# Altium PCB 2008_SablierElectronique_PCB.PcbDoc (part 1 of 2)
Units mil, origin at the board's own origin, x right, y up, seen from the top; angles counter-clockwise.
Board outline 5246.25 x 5915.54 mil, 2 copper layers (Top Layer, Bottom Layer), stack 62.441 mil thick; 184 components, 217 nets, 656 pads, 372 vias.
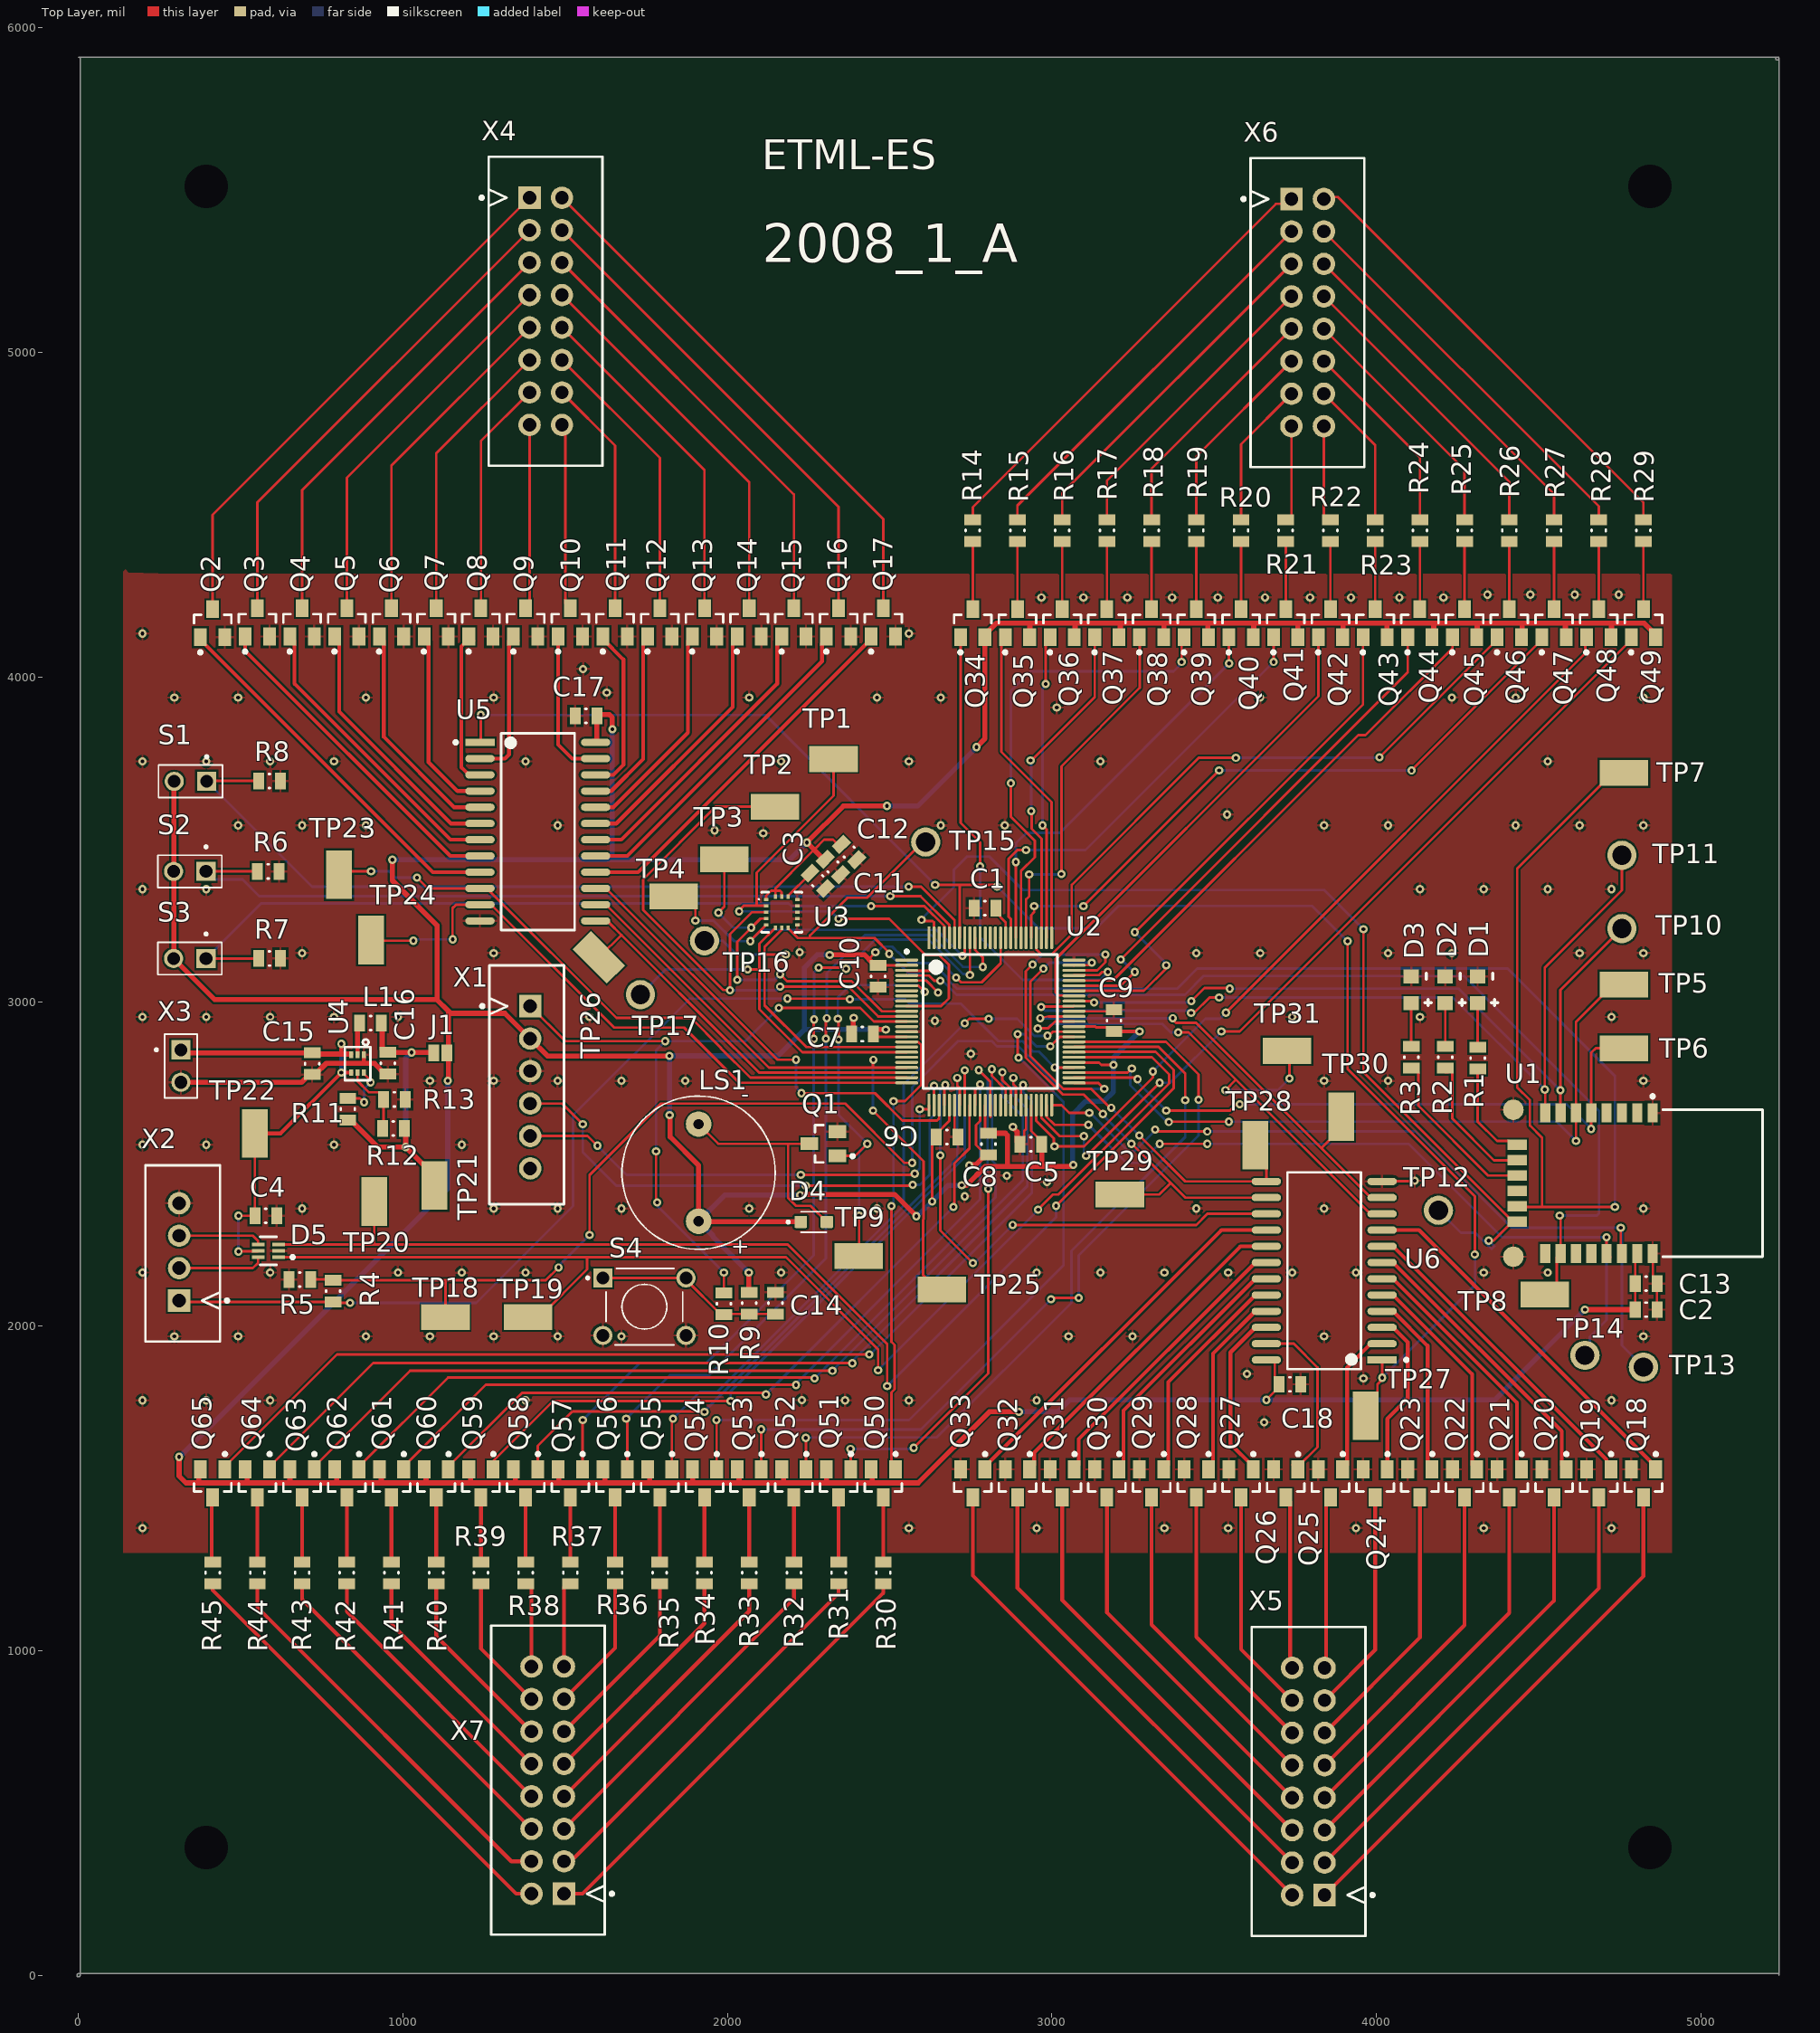
[diagram p0: Top Layer view]
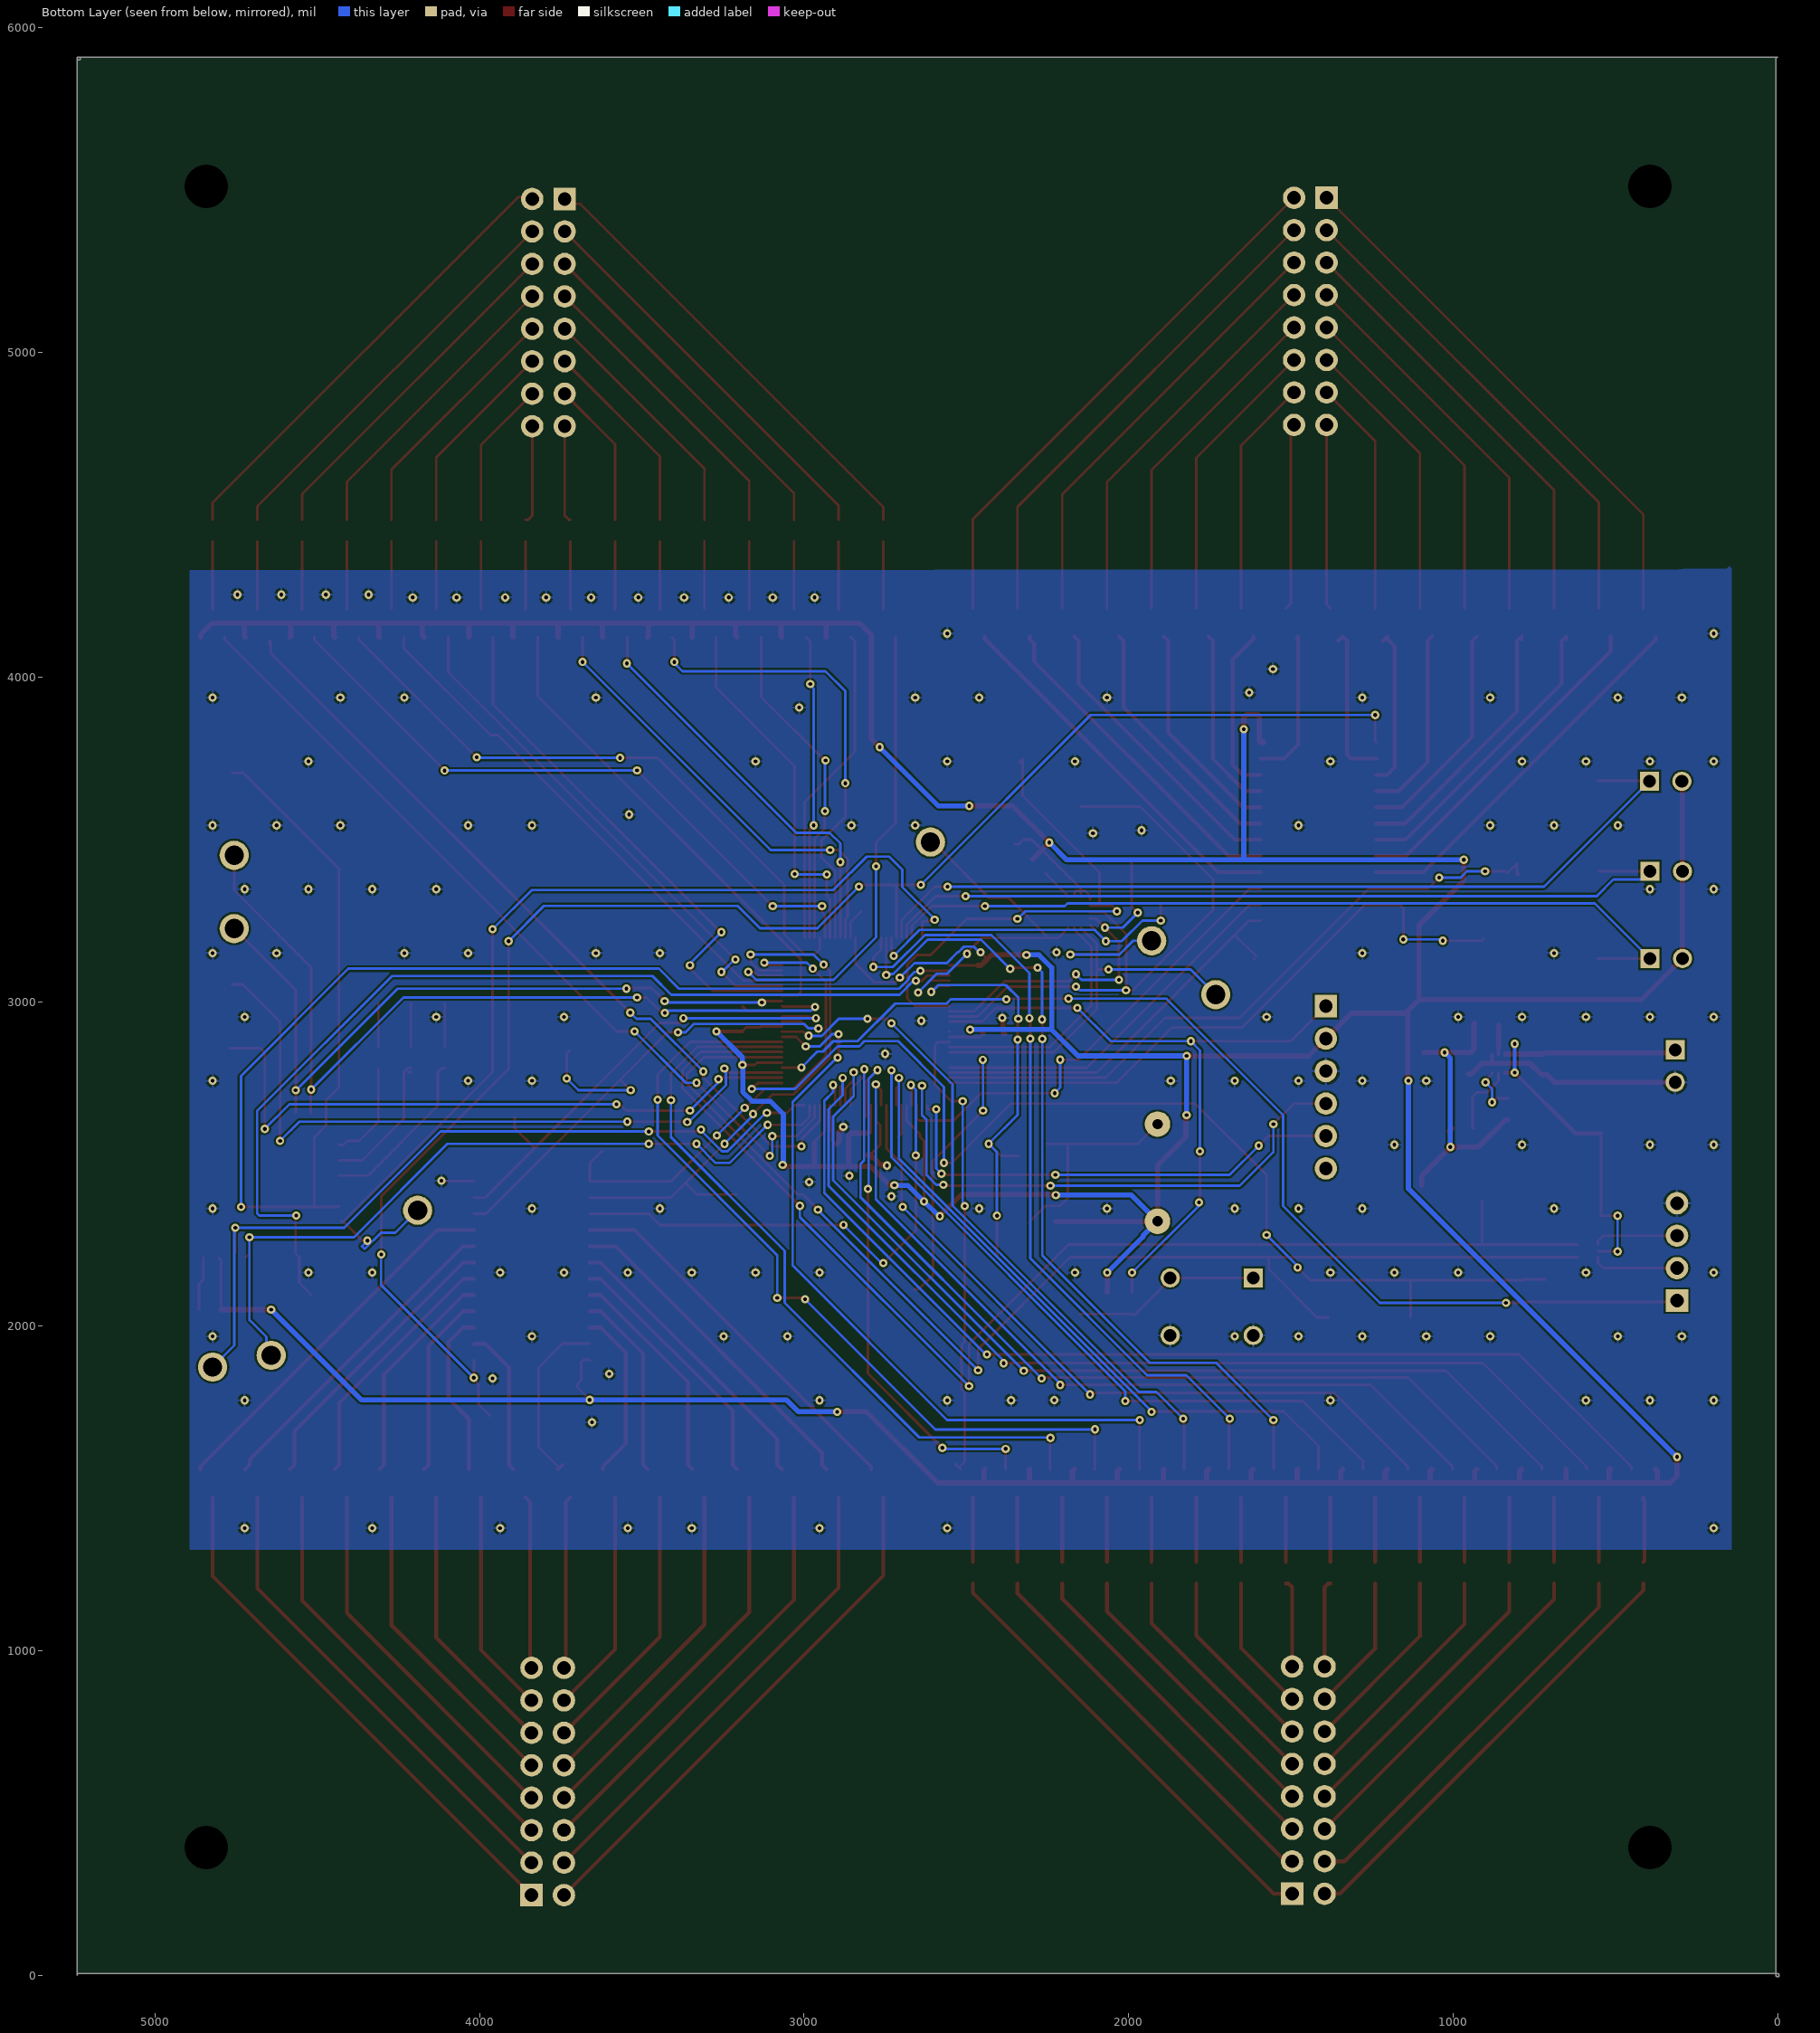
[diagram p1: Bottom Layer view, seen from below]

## Layer stack, top to bottom
Top Solder: solder mask 0.4, Solder Resist, Dk 3.5
Top Layer: signal copper 0.7087
Dielectric1: core 61.0236, FR-4, Dk 4.8
Bottom Layer: signal copper 0.7087
Bottom Solder: solder mask 0.4, Solder Resist, Dk 3.5

## Board outline
0,-5.01 cw(c0,0) -5.01,0 cw(c0,0) 0,5.02 5236.22,5.02 cw(c5236.22,0) 5241.24,0 5241.24,5905.51 ccw(c5236.22,5905.51) 5236.15,5910.53 ccw(c5236.22,5905.51) 5232.81,5909.19 cw(c5234.25,5905.51) 5234.25,5909.46 5236.22,5909.46 cw(c5236.22,5905.51) 5240.17,5905.51 cw(c5236.22,5905.51) 5236.22,5901.56 5234.25,5901.56 cw(c5234.25,5905.51) 5231.21,5902.99 cw(c5234.25,5905.51) 5232.81,5909.19 5236.22,5910.53 0,5910.53 cw(c0,5905.51) 0,5910.53 cw(c0,5905.51) 5.01,5905.51 5.01,5900.5 5.02,5.02 5.02,0 cw(c0,0)

## Design rules (kind name [scope] priority, off if disabled: settings)
BoardOutlineClearance [All] p1: gap=9.84 ignorepadtopadclearanceinfootprint=FALSE except(0: Arc-SplitContinuation Track-SplitContinuation SMDPad-SplitContinuation THPad-SplitContinuation Via-SplitContinuation Fill-SplitContinuation Poly-SplitContinuation Region-SplitContinuation Text-SplitContinuation)
Clearance Clearance-xPP-xTP-xTT [All] p1: gap=5.91 ignorepadtopadclearanceinfootprint=FALSE except(0: Arc-Hole Track-Hole SMDPad-Hole THPad-Hole Via-Hole Fill-Hole Poly-Hole Region-Hole Text-Hole)
ComponentClearance [All] p1: gap=9.84 collisioncheckmode=3 verticalgap=9.84 showdistances=FALSE
DiffPairsRouting [All] p1: maxlimit=9.84 minlimit=9.84 mostfreqgap=9.84 toplayer_minwidth=15 toplayer_maxwidth=15 toplayer_prefwidth=15 bottomlayer_minwidth=15 bottomlayer_maxwidth=15 bottomlayer_prefwidth=15 maxuncoupledlength=492.13
Height [All] p1: minheight=0 maxheight=984.25 prefheight=492.13
HoleSize HoleSize-PTH [All] p1: absolutevalues=TRUE maxlimit=393.7 minlimit=9.84 maxpercent=80.000 minpercent=20.000
HoleToHoleClearance [All] p1: gap=13.78 allowstackedmicrovias=TRUE
MinimumAnnularRing "Minimum IAR  >0.45mm" [((ObjectKind = 'Pad') OR (ObjectKind = 'Via')) And (Layer = 'MultiLayer') And (HoleDiameter > AsMM(0.45))] p1: minimumring=6.89 // minimum inner annular ring for pads > 0.45mm finished hole size
MinimumAnnularRing "Minimum IAR <=0.45mm" [((ObjectKind = 'Pad') OR (ObjectKind = 'Via')) And (Layer = 'MultiLayer') And (HoleDiameter <= AsMM(0.45))] p2: minimumring=6.89 // minimum inner annular ring for pads <= 0.45mm finished hole size
MinimumSolderMaskSliver [All] p1: minsoldermaskwidth=3.15
PasteMaskExpansion [All] p1: expansion=-0.98
PlaneClearance PlaneClearance-IPI [All] p1: clearance=9.84
PlaneConnect [All] p1: planeconnectstyle=Relief reliefexpansion=6.89 reliefentries=4 reliefconductorwidth=7.87 reliefairgap=7.87
PolygonConnect PolygonConnect-xTW [All] p1: connectstyle=Relief reliefconductorwidth=7.87 reliefentries=4 polygonreliefangle="90 Angle" airgapwidth=7.87
RoutingCorners [All] p1: cornerstyle=45-Degree minsetback=98.43 maxsetback=98.43
RoutingVias RoutingViasES [All] p1: holewidth=11.81 width=25.59 viastyle="Through Hole" minholewidth=9.84 minwidth=24.02 maxholewidth=17.72 maxwidth=31.5 // finishet hole size <= 0.45mm
SilkToSilkClearance [All] p1: silktosilkclearance=7.87
SilkToSolderMaskClearance SilkscreenOverComponentPads [IsPad] p1: minsilkscreentomaskgap=7.87 clearancetoexposedcopper=TRUE
SolderMaskExpansion [All] p1: expansion=0
UnRoutedNet [All] p1: checkbadconnections=TRUE
Width Alim [InNetClass('Power')] p1: maxlimit=15.75 minlimit=7.87 preferedwidth=11.81 minimp=50.000000 maximp=50.000000 favimp=50.000000
Width Width-xTW [All] p2: maxlimit=59.06 minlimit=7.87 preferedwidth=11.81 minimp=50.000000 maximp=50.000000 favimp=50.000000
17 further rules are at their usual default settings.

## Classes and differential pairs
net class Power: +5 GND NetC16_2 NetL1_2 VCC
component class 2008_SablierElectronique_MosfetConnections: Q34 Q35 Q36 Q37 Q38 Q39 Q40 Q41 Q42 Q43 Q44 Q45 Q46 Q47 Q48 Q49 Q50 Q51 Q52 Q53 Q54 Q55 Q56 Q57 Q58 Q59 Q60 Q61 Q62 Q63 Q64 Q65 R14 R15 R16 R17 R18 R19 R20 R21 R22 R23 R24 R25 R26 R27 R28 R29 R30 R31 R32 R33 R34 R35 R36 R37 R38 R39 R40 R41 R42 R43 R44 R45 X6 X7
component class 2008_SablierElectronique_Commande_Matrice: C17 C18 Q2 Q3 Q4 Q5 Q6 Q7 Q8 Q9 Q10 Q11 Q12 Q13 Q14 Q15 Q16 Q17 Q18 Q19 Q20 Q21 Q22 Q23 Q24 Q25 Q26 Q27 Q28 Q29 Q30 Q31 Q32 Q33 TP23 TP24 TP25 TP26 TP27 TP28 TP29 TP30 TP31 U5 U6 X4 X5
component class 2008_SablierElectronique_Alim: C15 C16 J1 L1 R11 R12 R13 TP21 TP22 U4 X3
component class 2008_SablierElectronique_SCH: C1 C2 C3 C4 C5 C6 C7 C8 C9 C10 C11 C12 C13 C14 D1 D2 D3 D4 D5 LS1 Q1 R1 R2 R3 R4 R5 R6 R7 R8 R9 R10 S1 S2 S3 S4 TP1 TP2 TP3 TP4 TP5 TP6 TP7 TP8 TP9 TP10 TP11 TP12 TP13 TP14 TP15 TP16 TP17 TP18 TP19 TP20 U1 U3 X1 X2

## Components (designator, comment, footprint, x,y, rotation, side; value= is the part's Value field where it differs from the comment)
C1 "10uF" RESC0805(2012)_L 2793.31,3288.38 r180 top
C2 "4.7uF" RESC0805(2012)_L 4831,2050.82 r180 top
C3 "10nF" RESC0805(2012)_L 2278,3372.08 r135 top
C4 "100nF" RESC0805(2012)_L 577,2340 r180 top
C5 "100nF" RESC0805(2012)_L 2935,2560 r0 top
C6 "100nF" RESC0805(2012)_L 2676.54,2583.06 r180 top
C7 "100nF" RESC0805(2012)_L 2415.46,2900 r0 top
C8 "100nF" RESC0805(2012)_L 2804,2561 r90 top
C9 "100nF" RESC0805(2012)_L 3191,2941.54 r270 top
C10 "100nF" RESC0805(2012)_L 2464,3078 r90 top
C11 "100nF" RESC0805(2012)_L 2325,3415 r135 top
C12 "10uF" RESC0805(2012)_L 2374.81,3460.86 r135 top
C13 "100nF" RESC0805(2012)_L 4831,2130.82 r180 top
C14 "100nf" RESC0805(2012)_L 2148,2071 r270 top
C15 "10uF" RESC0805(2012)_L 720,2808.82 r90 top
C16 "22uF" RESC0805(2012)_L 953.43,2810 r90 top
C17 "100nF" RESC0805(2012)_L 1564,3880 r0 top
C18 "100nF" RESC0805(2012)_L 3733,1821 r180 top
D1 "KPT-2012SRC-PRV" 0805_LED 4312,3036.18 r270 top
D2 "KPT-2012SRC-PRV" 0805_LED 4212,3036.18 r270 top
D3 "KPT-2012SRC-PRV" 0805_LED 4107.18,3036.18 r270 top
D4 "SD0805S040S0R1" DIOSC130X200X100-2N 2266,2321.05 r0 top
D5 "USBLC6-2P6" FP-SOT-666-MFG 585,2232 r180 top
J1 "Jumper" Jumper 1114.99,2842.28 r180 top
L1 "LQM21PN1R0MCHD0" RESC0805(2012)_L 900,2934.23 r180 top value=1uH
LS1 "CMI-1295IC-0385T" CUI_CMI-1295IC-0385T 1911,2473 r180 top
Q1 "Mosfet-N" FAIR-SOT23-3_V 2295.46,2562 r90 top
Q2 "Mosfet-N" FAIR-SOT23-3_V 413.39,4166.14 r0 top
Q3 "Mosfet-N" FAIR-SOT23-3_V 551.18,4168.53 r0 top
Q4 "Mosfet-N" FAIR-SOT23-3_V 688.98,4168.53 r0 top
Q5 "Mosfet-N" FAIR-SOT23-3_V 826.77,4168.53 r0 top
Q6 "Mosfet-N" FAIR-SOT23-3_V 964.57,4168.53 r0 top
Q7 "Mosfet-N" FAIR-SOT23-3_V 1102.36,4168.53 r0 top
Q8 "Mosfet-N" FAIR-SOT23-3_V 1240.16,4168.53 r0 top
Q9 "Mosfet-N" FAIR-SOT23-3_V 1377.95,4168.53 r0 top
Q10 "Mosfet-N" FAIR-SOT23-3_V 1515.75,4168.53 r0 top
Q11 "Mosfet-N" FAIR-SOT23-3_V 1653.54,4168.53 r0 top
Q12 "Mosfet-N" FAIR-SOT23-3_V 1791.34,4168.53 r0 top
Q13 "Mosfet-N" FAIR-SOT23-3_V 1929.13,4168.53 r0 top
Q14 "Mosfet-N" FAIR-SOT23-3_V 2066.93,4168.53 r0 top
Q15 "Mosfet-N" FAIR-SOT23-3_V 2204.72,4168.53 r0 top
Q16 "Mosfet-N" FAIR-SOT23-3_V 2342.52,4168.53 r0 top
Q17 "Mosfet-N" FAIR-SOT23-3_V 2480.31,4168.53 r0 top
Q18 "Mosfet-N" FAIR-SOT23-3_V 4822.83,1515.75 r180 top
Q19 "Mosfet-N" FAIR-SOT23-3_V 4685.04,1515.75 r180 top
Q20 "Mosfet-N" FAIR-SOT23-3_V 4547.24,1515.75 r180 top
Q21 "Mosfet-N" FAIR-SOT23-3_V 4409.45,1515.75 r180 top
Q22 "Mosfet-N" FAIR-SOT23-3_V 4271.65,1515.75 r180 top
Q23 "Mosfet-N" FAIR-SOT23-3_V 4133.86,1515.75 r180 top
Q24 "Mosfet-N" FAIR-SOT23-3_V 3996.06,1515.75 r180 top
Q25 "Mosfet-N" FAIR-SOT23-3_V 3858.27,1515.75 r180 top
Q26 "Mosfet-N" FAIR-SOT23-3_V 3720.47,1515.75 r180 top
Q27 "Mosfet-N" FAIR-SOT23-3_V 3582.68,1515.75 r180 top
Q28 "Mosfet-N" FAIR-SOT23-3_V 3444.88,1515.75 r180 top
Q29 "Mosfet-N" FAIR-SOT23-3_V 3307.09,1515.75 r180 top
Q30 "Mosfet-N" FAIR-SOT23-3_V 3169.29,1515.75 r180 top
Q31 "Mosfet-N" FAIR-SOT23-3_V 3031.5,1515.75 r180 top
Q32 "Mosfet-N" FAIR-SOT23-3_V 2893.7,1515.75 r180 top
Q33 "Mosfet-N" FAIR-SOT23-3_V 2755.91,1515.75 r180 top
Q34 "Mosfet P" FAIR-SOT23-3_V 2755.91,4166.14 r0 top
Q35 "Mosfet P" FAIR-SOT23-3_V 2893.7,4166.14 r0 top
Q36 "Mosfet P" FAIR-SOT23-3_V 3031.5,4166.14 r0 top
Q37 "Mosfet P" FAIR-SOT23-3_V 3169.29,4166.14 r0 top
Q38 "Mosfet P" FAIR-SOT23-3_V 3307.09,4166.14 r0 top
Q39 "Mosfet P" FAIR-SOT23-3_V 3444.88,4166.14 r0 top
Q40 "Mosfet P" FAIR-SOT23-3_V 3582.68,4166.14 r0 top
Q41 "Mosfet P" FAIR-SOT23-3_V 3720.47,4166.14 r0 top
Q42 "Mosfet P" FAIR-SOT23-3_V 3858.27,4166.14 r0 top
Q43 "Mosfet P" FAIR-SOT23-3_V 3996.06,4166.14 r0 top
Q44 "Mosfet P" FAIR-SOT23-3_V 4133.86,4166.14 r0 top
Q45 "Mosfet P" FAIR-SOT23-3_V 4271.65,4166.14 r0 top
Q46 "Mosfet P" FAIR-SOT23-3_V 4409.45,4166.14 r0 top
Q47 "Mosfet P" FAIR-SOT23-3_V 4547.24,4166.14 r0 top
Q48 "Mosfet P" FAIR-SOT23-3_V 4685.04,4166.14 r0 top
Q49 "Mosfet P" FAIR-SOT23-3_V 4822.83,4166.14 r0 top
Q50 "Mosfet P" FAIR-SOT23-3_V 2480.31,1515.75 r180 top
Q51 "Mosfet P" FAIR-SOT23-3_V 2342.52,1515.75 r180 top
Q52 "Mosfet P" FAIR-SOT23-3_V 2204.72,1515.75 r180 top
Q53 "Mosfet P" FAIR-SOT23-3_V 2066.93,1515.75 r180 top
Q54 "Mosfet P" FAIR-SOT23-3_V 1929.13,1515.75 r180 top
Q55 "Mosfet P" FAIR-SOT23-3_V 1791.34,1515.75 r180 top
Q56 "Mosfet P" FAIR-SOT23-3_V 1653.54,1515.75 r180 top
Q57 "Mosfet P" FAIR-SOT23-3_V 1515.75,1515.75 r180 top
Q58 "Mosfet P" FAIR-SOT23-3_V 1377.95,1515.75 r180 top
Q59 "Mosfet P" FAIR-SOT23-3_V 1240.16,1515.75 r180 top
Q60 "Mosfet P" FAIR-SOT23-3_V 1102.36,1515.75 r180 top
Q61 "Mosfet P" FAIR-SOT23-3_V 964.57,1515.75 r180 top
Q62 "Mosfet P" FAIR-SOT23-3_V 826.77,1515.75 r180 top
Q63 "Mosfet P" FAIR-SOT23-3_V 688.98,1515.75 r180 top
Q64 "Mosfet P" FAIR-SOT23-3_V 551.18,1515.75 r180 top
Q65 "Mosfet P" FAIR-SOT23-3_V 413.39,1515.75 r180 top
R1 "680" RESC0805(2012)_L 4312,2826 r90 top
R2 "680" RESC0805(2012)_L 4212,2828.66 r90 top
R3 "680" RESC0805(2012)_L 4107.18,2828.66 r90 top
R4 "51k" RESC0805(2012)_L 785,2108 r270 top
R5 "100k" RESC0805(2012)_L 682,2144 r180 top
R6 "10k" RESC0805(2012)_L 584.64,3401.32 r0 top
R7 "10k" RESC0805(2012)_L 588.58,3132.82 r0 top
R8 "10k" RESC0805(2012)_L 588.58,3680 r0 top
R9 "10k" RESC0805(2012)_L 2066.93,2071 r270 top
R10 "1k" RESC0805(2012)_L 1989,2069 r90 top
R11 "1M" RESC0805(2012)_L 830,2668.82 r90 top
R12 "453k" RESC0805(2012)_L 970,2608.82 r180 top
R13 "100k" RESC0805(2012)_L 973.46,2698.82 r0 top
R14 "680" RESC0805(2012)_L 2755.91,4451.57 r270 top
R15 "680" RESC0805(2012)_L 2893.7,4451.57 r270 top
R16 "680" RESC0805(2012)_L 3031.5,4451.57 r270 top
R17 "680" RESC0805(2012)_L 3169.29,4451.57 r270 top
R18 "680" RESC0805(2012)_L 3307.09,4451.57 r270 top
R19 "680" RESC0805(2012)_L 3444.88,4451.57 r270 top
R20 "680" RESC0805(2012)_L 3582.68,4451.57 r270 top
R21 "680" RESC0805(2012)_L 3720.47,4451.57 r270 top
R22 "680" RESC0805(2012)_L 3858.27,4451.57 r270 top
R23 "680" RESC0805(2012)_L 3996.06,4451.57 r270 top
R24 "680" RESC0805(2012)_L 4133.86,4451.57 r270 top
R25 "680" RESC0805(2012)_L 4271.65,4451.57 r270 top
R26 "680" RESC0805(2012)_L 4409.45,4451.57 r270 top
R27 "680" RESC0805(2012)_L 4547.24,4451.57 r270 top
R28 "680" RESC0805(2012)_L 4685.04,4451.57 r270 top
R29 "680" RESC0805(2012)_L 4822.83,4451.57 r270 top
R30 "680" RESC0805(2012)_L 2480.31,1240.16 r90 top
R31 "680" RESC0805(2012)_L 2342.52,1240.16 r90 top
R32 "680" RESC0805(2012)_L 2204.72,1240.16 r90 top
R33 "680" RESC0805(2012)_L 2066.93,1240.16 r90 top
R34 "680" RESC0805(2012)_L 1929.13,1240.16 r90 top
R35 "680" RESC0805(2012)_L 1791.34,1240.16 r90 top
R36 "680" RESC0805(2012)_L 1653.54,1240.16 r90 top
R37 "680" RESC0805(2012)_L 1515.75,1240.16 r90 top
R38 "680" RESC0805(2012)_L 1377.95,1240.16 r90 top
R39 "680" RESC0805(2012)_L 1240.16,1240.16 r90 top
R40 "680" RESC0805(2012)_L 1102.36,1240.16 r90 top
R41 "680" RESC0805(2012)_L 964.57,1240.16 r90 top
R42 "680" RESC0805(2012)_L 826.77,1240.16 r90 top
R43 "680" RESC0805(2012)_L 688.98,1240.16 r90 top
R44 "680" RESC0805(2012)_L 551.18,1240.16 r90 top
R45 "680" RESC0805(2012)_L 413.39,1240.16 r90 top
S1 "Bouton HAUT" "Header 2 pin" 395,3678.82 r270 top
S2 "Bouton BAS" "Header 2 pin" 393,3401.32 r270 top
S3 "Bouton H/M/S" "Header 2 pin" 393,3132.82 r270 top
S4 "FSM4JH" SW_FSM4JH 1744,2060 r0 top
TP1 "5019" TESTPOINT_SMD#1 2326.78,3747.34 r180 top
TP2 "5019" TESTPOINT_SMD#1 2146.42,3600.48 r0 top
TP3 "5019" TESTPOINT_SMD#1 1990.45,3438.66 r0 top
TP4 "5019" TESTPOINT_SMD#1 1834.63,3323.88 r0 top
TP5 "5019" TESTPOINT_SMD#1 4763.04,3052.87 r0 top
TP6 "5019" TESTPOINT_SMD#1 4763.04,2856.31 r0 top
TP7 "5019" TESTPOINT_SMD#1 4763.04,3704.7 r0 top
TP8 "5019" TESTPOINT_SMD#1 4519,2097.35 r0 top
TP9 "5019" TESTPOINT_SMD#1 2404.73,2216.38 r0 top
TP10 "5019" TESTPOINT_SMD_Via 4756.51,3225.15 r0 top
TP11 "5019" TESTPOINT_SMD_Via 4756.51,3451 r0 top
TP12 "5019" TESTPOINT_SMD_Via 4191,2356.96 r0 top
TP13 "5019" TESTPOINT_SMD_Via 4822.84,1874.01 r0 top
TP14 "5019" TESTPOINT_SMD_Via 4642.56,1910.31 r0 top
TP15 "5019" TESTPOINT_SMD_Via 2610.6,3491.58 r0 top
TP16 "5019" TESTPOINT_SMD_Via 1929,3187.6 r0 top
TP17 "5019" TESTPOINT_SMD_Via 1731.61,3021.7 r0 top
TP18 "5019" TESTPOINT_SMD#1 1131,2027.5 r0 top
TP19 "5019" TESTPOINT_SMD#1 1385.24,2027.5 r180 top
TP20 "5019" TESTPOINT_SMD#1 911.25,2384 r90 top
TP21 "5019" TESTPOINT_SMD#1 1096.78,2433.69 r90 top
TP22 "5019" TESTPOINT_SMD#1 543.54,2593.89 r90 top
TP23 "5019" TESTPOINT_SMD#1 803.15,3391.28 r270 top
TP24 "5019" TESTPOINT_SMD#1 901.27,3189.8 r270 top
TP25 "5019" TESTPOINT_SMD#1 2660.29,2113.4 r0 top
TP26 "5019" TESTPOINT_SMD#2 1603.62,3136.26 r90 top
TP27 "5019" TESTPOINT_SMD#1 3967.12,1724 r90 top
TP28 "5019" TESTPOINT_SMD#1 3626.66,2557.93 r270 top
TP29 "5019" TESTPOINT_SMD#1 3209.35,2405.51 r0 top
TP30 "5019" TESTPOINT_SMD#1 3891.93,2645.08 r90 top
TP31 "5019" TESTPOINT_SMD#1 3724,2848.42 r0 top
U1 "MCHP-RN4020-MODULE-24" MCHP-MODULE-24_V 4636.43,2440.47 r270 top
U2 "MC-32B-MX795-SQ100" TQFP-PT100_N 2810,2938.82 r0 top
U3 "STM-L3GD20H-LGA-16_A" STM-LGA-16 2167.32,3275.66 r0 top
U4 "TLV62585PDRLR" SOT563 860,2808.82 r270 top
U5 "CD74HCT4067" SOIC24 1415.35,3523.82 r0 top
U6 "CD74HCT4067" SOIC24 3839,2171 r180 top
X1 "ICD" CON6 1392,2986 r270 top
X2 "USB" CON4 310,2078.82 r90 top
X3 "Alimentation" "Header 2 pin" 315.59,2851.5 r0 top
X4 "Lignes haut" CON8X8(EDITED) 1390,5477 r270 top
X5 "Lignes bas" CON8X8(EDITED) 3840.16,247.12 r90 top
X6 "Colonnes haut" CON8X8(EDITED) 3738,5473 r270 top
X7 "Colonnes bas" CON8X8(EDITED) 1496.06,251.18 r90 top

## Footprints (in the part's own frame and the unit in brackets; to place one, negate y for a bottom-side part, rotate by r counter-clockwise, add the part's x,y. Pads: shape width x height; smd on the part's side, far side on the other; paste and mask are expansions set on the pad)
0805_LED [mm] "Chip LED, 2-Leads, Body 2.0x1.3mm, IPC Medium Density"
  rect 1.1x1.2 smd: 1(-1.05,0) 2(1.05,0)
  silkscreen extent -1.3,1.09 1.22,1.55, body extent -1,-0.62 1,0.63, height 0.68
CON4 [mm] "2.54mm pitch, 16 pin, header;shrouded"
  rect 1.75x1.75 / inner round 1.75 / far side rect 1.75x1.75 hole 1.05 mask+0: 1(0,0)
  round 1.75 hole 1.05 mask+0: 2(2.54,0) 3(5.08,0) 4(7.62,0)
  silkscreen extent -3.2,-3.88 10.59,2.64
CON6 [mm] "2.54mm pitch, 16 pin, header;shrouded"
  rect 1.75x1.75 / inner round 1.75 / far side rect 1.75x1.75 hole 1.05 mask+0: 1(0,0)
  round 1.75 hole 1.05 mask+0: 2(2.54,0) 3(5.08,0) 4(7.62,0) 5(10.16,0) 6(12.7,0)
  silkscreen extent -3.2,-3.87 15.49,2.64
CON8X8(EDITED) [mm] "2.54mm pitch, 16 pin, header;shrouded"
  rect 1.75x1.75 / inner round 1.75 / far side rect 1.75x1.75 hole 1.05 mask+0: 1(0,0)
  round 1.75 hole 1.05 mask+0: 2(2.54,0) 3(5.08,0) 4(7.62,0) 5(10.16,0) 6(12.7,0) 7(15.24,0) 8(17.78,0) 9(17.78,2.54) 10(15.24,2.54) 11(12.7,2.54) 12(10.16,2.54) 13(7.62,2.54) 14(5.08,2.54) 15(2.54,2.54) 16(0,2.54)
  silkscreen extent -3.2,-3.87 20.98,5.7, body extent -1.37,-1.27 18.95,3.76, height 9.59
CUI_CMI-1295IC-0385T [mm]
  round 2 hole 0.8: N(0,-3.8) P(0,3.8)
  silkscreen extent -6,-6 6,6
DIOSC130X200X100-2N [mm]
  rrect25% 0.99x0.97 smd: A(1.02,0) C(-1.02,0)
  silkscreen extent -2.1,-0.8 1,0.81
FAIR-SOT23-3_V [mm] "SOT23, 3-Leads, Body 2.92x1.3mm, Pitch 0.95mm"
  rect 1x1.4 smd: 1(-0.95,-1.1) 2(0.95,-1.1) 3(0,1.1)
  silkscreen extent -1.46,-2.41 1.46,0.65, body extent -1.46,-0.65 1.46,0.65, height 1.2
FP-SOT-666-MFG [mm]
  rect 0.99x0.3 smd paste+0 mask+0: 1(-0.805,0.5) 2(-0.805,0) 3(-0.805,-0.5) 4(0.805,-0.5) 5(0.805,0) 6(0.805,0.5)
  silkscreen extent -2.02,-1.1 0.65,1.1, body extent -1.4,-0.95 1.4,0.95, height 0.25
"Header 2 pin" [mm]
  rect 1.5x1.5 hole 1: 1(0,0)
  round 1.5 hole 1: 2(0,-2.54)
  silkscreen extent -2.02,-3.77 1.27,1.23
Jumper [mm] "Jumper SMD"
  rect 0.85x1.3 smd paste+0 mask+0.025: 1(-0.508,0)
  rect 0.85x1.3 smd mask+0.025: 2(0.508,0)
MCHP-MODULE-24_V [mm] "Module, 24-Leads, Body 11.5x19.5mm, Pitch 1.2mm"
  rect 1.5x0.8 smd: 1(-5.5,5.45) 2(-5.5,4.25) 3(-5.5,3.05) 4(-5.5,1.85) 5(-5.5,0.65) 6(-5.5,-0.55) 7(-5.5,-1.75) 8(-5.5,-2.95) 17(5.5,-2.95) 18(5.5,-1.75) 19(5.5,-0.55) 20(5.5,0.65) 21(5.5,1.85) 22(5.5,3.05) 23(5.5,4.25) 24(5.5,5.45)
  round 1.6 smd: 9(-5.75,-5.45) 16(5.75,-5.45)
  rect 0.8x1.5 smd: 10(-3,-5.15) 11(-1.8,-5.15) 12(-0.6,-5.15) 13(0.6,-5.15) 14(1.8,-5.15) 15(3,-5.15)
  silkscreen extent -6.92,5.33 5.75,14.05, body extent -5.75,-5.45 5.75,14.05, height 2.3
RESC0805(2012)_L [mm] "Chip Resistor, Body 2.0x1.3mm, IPC High Density"
  rect 0.85x1.3 smd: 1(-0.85,0) 2(0.85,0)
  silkscreen extent -0.05,-0.55 0.05,0.55, body extent -1.1,-0.67 1.1,0.68, height 0.7
SOIC24 [mil]
  rect 90.47x22.32 smd paste+0 mask+0: 1(-178.27,275)
  rrect100% 90.47x22.32 smd paste+0 mask+0: 2(-178.27,225) 3(-178.27,175) 4(-178.27,125) 5(-178.27,75) 6(-178.27,25) 7(-178.27,-25) 8(-178.27,-75) 9(-178.27,-125) 10(-178.27,-175) 11(-178.27,-225) 12(-178.27,-275) 13(178.27,-275) 14(178.27,-225) 15(178.27,-175) 16(178.27,-125) 17(178.27,-75) 18(178.27,-25) 19(178.27,25) 20(178.27,75) 21(178.27,125) 22(178.27,175) 23(178.27,225) 24(178.27,275)
  silkscreen extent -258,-303 113,303, body extent -233,-313 233,313, height 10
SOT563 [mil] "SOT563, 6-Leads, Body 1.6x1.6mm, Pitch 0.5mm"
  rect 20x12 smd: 1(-27.56,19.68) 2(-27.56,0) 3(-27.56,-19.69) 4(27.56,-19.69) 5(27.56,0) 6(27.56,19.68)
  silkscreen extent -75,-39 51,39, body extent -31,-31 32,31, height 22
STM-LGA-16 [mm] "LGA, 16-Leads, Body 3x3mm, Pitch 0.5mm"
  rect 0.35x0.25 smd: 1(-1.225,1) 2(-1.225,0.5) 3(-1.225,0) 4(-1.225,-0.5) 5(-1.225,-1) 9(1.225,-1) 10(1.225,-0.5) 11(1.225,0) 12(1.225,0.5) 13(1.225,1)
  rect 0.25x0.35 smd: 6(-0.5,-1.225) 7(0,-1.225) 8(0.5,-1.225) 14(0.5,1.225) 15(0,1.225) 16(-0.5,1.225)
  silkscreen extent -1.85,-1.58 1.58,1.57, body extent -1.5,-1.5 1.5,1.5, height 1
SW_FSM4JH [mm]
  rect 1.498x1.498 hole 0.99: 1(-3.25,2.25)
  round 1.498 hole 0.99: 2(3.25,2.25) 3(-3.25,-2.25) 4(3.25,-2.25)
  silkscreen extent -4.54,-2.99 3,2.99
TESTPOINT_SMD#1 [mm]
  rect 3.8x2.03 smd: 1(0,0)
  body extent -1.91,-1.02 1.91,1.01, height 2.29
TESTPOINT_SMD#2 [mm]
  rect 3.8x2.03 smd rot 45: 1(0,0)
  body extent -1.91,-1.02 1.91,1.01, height 2.29
TESTPOINT_SMD_Via [mil]
  round 90 hole 59.06: 1(0,0)
TQFP-PT100_N [mm] "Thin QFP, 100-Leads, Body 12x12mm, Pitch 0.4mm, IPC Medium Density"
  oval 1.8x0.24 smd: 1(-6.55,4.8) 2(-6.55,4.4) 3(-6.55,4) 4(-6.55,3.6) 5(-6.55,3.2) 6(-6.55,2.8) 7(-6.55,2.4) 8(-6.55,2) 9(-6.55,1.6) 10(-6.55,1.2) 11(-6.55,0.8) 12(-6.55,0.4) 13(-6.55,0) 14(-6.55,-0.4) 15(-6.55,-0.8) 16(-6.55,-1.2) 17(-6.55,-1.6) 18(-6.55,-2) 19(-6.55,-2.4) 20(-6.55,-2.8) 21(-6.55,-3.2) 22(-6.55,-3.6) 23(-6.55,-4) 24(-6.55,-4.4) 25(-6.55,-4.8) 51(6.55,-4.8) 52(6.55,-4.4) 53(6.55,-4) 54(6.55,-3.6) 55(6.55,-3.2) 56(6.55,-2.8) 57(6.55,-2.4) 58(6.55,-2) 59(6.55,-1.6) 60(6.55,-1.2) 61(6.55,-0.8) 62(6.55,-0.4) 63(6.55,0) 64(6.55,0.4) 65(6.55,0.8) 66(6.55,1.2) 67(6.55,1.6) 68(6.55,2) 69(6.55,2.4) 70(6.55,2.8) 71(6.55,3.2) 72(6.55,3.6) 73(6.55,4) 74(6.55,4.4) 75(6.55,4.8)
  oval 0.24x1.8 smd: 26(-4.8,-6.55) 27(-4.4,-6.55) 28(-4,-6.55) 29(-3.6,-6.55) 30(-3.2,-6.55) 31(-2.8,-6.55) 32(-2.4,-6.55) 33(-2,-6.55) 34(-1.6,-6.55) 35(-1.2,-6.55) 36(-0.8,-6.55) 37(-0.4,-6.55) 38(0,-6.55) 39(0.4,-6.55) 40(0.8,-6.55) 41(1.2,-6.55) 42(1.6,-6.55) 43(2,-6.55) 44(2.4,-6.55) 45(2.8,-6.55) 46(3.2,-6.55) 47(3.6,-6.55) 48(4,-6.55) 49(4.4,-6.55) 50(4.8,-6.55) 76(4.8,6.55) 77(4.4,6.55) 78(4,6.55) 79(3.6,6.55) 80(3.2,6.55) 81(2.8,6.55) 82(2.4,6.55) 83(2,6.55) 84(1.6,6.55) 85(1.2,6.55) 86(0.8,6.55) 87(0.4,6.55) 88(0,6.55) 89(-0.4,6.55) 90(-0.8,6.55) 91(-1.2,6.55) 92(-1.6,6.55) 93(-2,6.55) 94(-2.4,6.55) 95(-2.8,6.55) 96(-3.2,6.55) 97(-3.6,6.55) 98(-4,6.55) 99(-4.4,6.55) 100(-4.8,6.55)
  silkscreen extent -6.67,-5.25 5.25,5.59, body extent -6,-6 6,6, height 1.2

## Part data
C1 C2 C3 C4 C5 C6 C7 C8 C9 C10 C11 C12 C13 C14 C15 C16 C17 C18: library part CAP1206
D4: "Diode Schottky 40V 100mA (DC) Surface Mount 0805 (2012 Metric)", Package="0805 AVX", Supplier Part Number 1=581-SD0805S040S0R5, Arrow_Electronics-Purchase-URL=https://snapeda.com/shop?store=Arrow+Electronics&id=809038, Availability=Good, DigiKey-Purchase-URL=https://snapeda.com/shop?store=DigiKey&id=809038, MF=AVX, Mouser-Purchase-URL=https://snapeda.com/shop?store=Mouser&id=809038, MP=SD0805S040S0R1, Price=None, SnapEDA_Link=https://www.snapeda.com/parts/SD0805S040S0R1/AVX/view-part/809038/?ref=snap, Supplier 1=Mouser
D5: Supplier Part Number 1=511-USBLC6-2P6, Supplier 1=Mouser
J1: library part Jumper_2p
L1: library part 744311100, "LQM21PN1R0MCHD", Supplier Part Number 1=81-LQM21PN1R0MCHD, Manufacturer Part Number=LQM21PN1R0MCHD, PackageReference=LQM21PN1R0MCHD, Supplier 1=Mouser
LS1: "12 mm, 3 Vdc, 85 dB, Through Hole, Driving Circuit, Magnetic Audio Indicator Buzzer", Package=Package, Supplier Part Number 1=490-CMI-1295IC-0385T, Availability=Unavailable, MF="CUI Devices", MP=CMI-1295IC-0385T, Price=None, SnapEDA_Link=https://www.snapeda.com/parts/CMI-1295IC-0385T/CUI%20Devices/view-part/4413411/?ref=snap, Supplier 1=Mouser
Q1 Q2 Q3 Q4 Q5 Q6 Q7 Q8 Q9 Q10 Q11 Q12 Q13 Q14 Q15 Q16 Q17 Q18 Q19 Q20 Q21 Q22 Q23 Q24 Q25 Q26 Q27 Q28 Q29 Q30 Q31 Q32 Q33: library part NEMOS-GSD-3_D
R1 R2 R3 R4 R5 R6 R7 R8 R9 R10 R11 R12 R13 R14 R15 R16 R17 R18 R19 R20 R21 R22 R23 R24 R25 R26 R27 R28 R29 R30 R31 R32 R33 R34 R35 R36 R37 R38 R39 R40 R41 R42 R43 R44 R45: library part RES
S1 S2 S3: library part "Switch SMD", "Switch Surface Mount", Package=None, Availability=Unavailable, MF=C&K, MP="PTS526 SM08 SMTR2 LFS", Price=None, SnapEDA_Link=https://www.snapeda.com/parts/PTS526%20SM08%20SMTR2%20LFS/C&K/view-part/4000306/?ref=snap
S4: "Switch Push Button OFF _ON_ SPST Round Button 0.05A 24VDC Momentary Contact PC Pins Thru-Hole", Contact_Current_Rating="50 mA", Package=None, Supplier Part Number 1=506-FSM4JH, Configuration_Pole-Throw="Single Pole - Single Throw", Digi-Key_Part_Number=450-1650-ND, Digi-Key_Purchase_URL=https://www.digikey.com/product-detail/en/te-connectivity-alcoswitch-switches/1825910-6/450-1650-ND/1632536?utm_source=snapeda&utm_medium=aggregator&utm_campaign=symbol, EU_RoHS_Compliance=Compliant, MF="TE Connectivity", MP=1825910-6, SnapEDA_Link=https://www.snapeda.com/parts/1825910-6/TE%20Connectivity%20ALCOSWITCH%20Switches/view-part/424522/?ref=snap, Supplier 1=Mouser, TE_purchase_URL=https://www.te.com/usa-en/product-1825910-6.html?te_bu=Cor&te_type=disp&te_campaign=seda_glo_cor-seda-global-disp-prtnr-fy19-seda-model-bom-cta_sma-317_1&elqCampaignId=32493
TP1 TP2 TP3 TP4 TP5 TP6 TP7 TP8 TP9 TP18 TP19 TP20 TP21 TP22 TP23 TP24 TP25 TP26 TP27 TP28 TP29 TP30 TP31: library part TESTPOINT, "Test point smd", Supplier Part Number 1=534-5019, Supplier 1=Mouser
TP10 TP11 TP12 TP13 TP14 TP15 TP16 TP17: library part TESTPOINT_via, "Test point smd"
U1: Supplier Part Number 1=579-RN4020-V/RM120, Supplier 1=Mouser
U2: Supplier Part Number 1=579-PIC32MX795F512, Supplier 1=Mouser
U3: Supplier Part Number 1=2762758, Supplier 1=Farnell
U4: "2.5V-5.5V input, 3-A high efficiency step-down converter in 2x2 QFN or SOT563 package 6-SOT-5X3 -40 to 125", Package="SOT-5X3-6 Texas Instruments", Supplier Part Number 1=595-TLV62585PDRLR, Arrow_Electronics-Purchase-URL=https://snapeda.com/shop?store=Arrow+Electronics&id=3229753, Availability=Good, MF="Texas Instruments", Mouser-Purchase-URL=https://snapeda.com/shop?store=Mouser&id=3229753, MP=TLV62585PDRLR, Price=None, SnapEDA_Link=https://www.snapeda.com/parts/TLV62585PDRLR/Texas%20Instruments/view-part/3229753/?ref=snap, Supplier 1=Mouser, Texas_Instruments-Purchase-URL=https://snapeda.com/shop?store=Texas+Instruments&id=3229753
U5 U6: Supplier Part Number 1=595-CD74HC4067M, Supplier 1=Mouser
X1: library part "Header 6 pins"
X2: library part "Header 4 pin"
X3: library part "Header 2 pin", "Connector Header Through Hole 2 position", Package=None, Availability=Unavailable, DigiKey-Purchase-URL=https://snapeda.com/shop?store=DigiKey&id=2390280, EU_RoHS_Compliance=Compliant, MF="TE Connectivity", Mouser-Purchase-URL=https://snapeda.com/shop?store=Mouser&id=2390280, MP=826632-1, Price=None, SnapEDA_Link=https://www.snapeda.com/parts/826632-1/TE%20Connectivity%20AMP%20Connectors/view-part/2390280/?ref=snap
X4 X5 X6 X7: library part "Mâle DIN 8 x 8"

## Free pads (board coordinates)
  round 60 hole 133.86 unplated: 2(393.7,393.7) 2(393.7,5511.81) 2(4842.52,393.7) 2(4842.52,5511.81)

## Via types
v1: diameter 25.59, hole 11.81, Top Layer to Bottom Layer, tented both sides, 237 vias
v2: diameter 25.59, hole 11.81, Top Layer to Bottom Layer, tented top, 134 vias
v3: diameter 25.59, hole 11.81, Top Layer to Bottom Layer, 1 vias

## Nets (pads, with @x,y where several pads share a name; then routed paths per layer and width w, separated by ;. In a path a pad name is that pad's centre, name@x,y a point inside that pad or via, vN(x,y) a via of type N, cw(c..) or ccw(c..) an arc to the next point about the centre after c; other vN are vias at no path point)
+5: C4.2 C15.2 D5.5 TP22.1 U4.3 U4.4 X3.1 | length 1498.4
  Top Layer w7.87: v1(493,2230) 494,2231 552.31,2231 D5.5@553.31,2232 ; v1(493,2340) C4.2@543.54,2340 TP22.1@543.54,2593.89
  Top Layer w11.81: TP22.1@543.54,2593.89 622.63,2593.89 v1(810,2781.26) U4.4@840.31,2781.26 ; 810,2838.5 v1(810,2870)
  Top Layer w15.75: X3.1@315.59,2851.5 324.8,2842.28 C15.2@720,2842.28 723.78,2838.5 810,2838.5 U4.3@838.44,2838.5
  Bottom Layer w7.87: v1(493,2230) v1(493,2340)
  Bottom Layer w11.81: v1(810,2781.26) v1(810,2870)
BMatriceON: U2.29 U6.15 | length 1626.5
  Top Layer w7.87: v1(2656,2526) 2656,2294.71 v1(2756.01,2194.7) ; U2.29@2668.27,2680.94 2668.27,2740.27 v1(2671,2743) ; v1(2879,2312) 3444.88,2312 3478.88,2346 U6.15@3660.73,2346
  Bottom Layer w7.87: v1(2656,2526) 2656,2728 v1(2671,2743) ; v1(2756.01,2194.7) 2761.7,2194.7 v1(2879,2312)
"Config IN/OUT": TP27.1 U2.94 U5.1 U6.1 | length 5086.6
  Top Layer w7.87: U5.1@1237.09,3798.82 1240,3801.73 v1(1240,3883) ; v1(2640,3360) 2715.51,3360 ; U2.94@2715.51,3196.69 2715.51,3360 ; v1(2831,3354) 2825,3360 2715.51,3360 ; v1(3911,3186) 3911,2792 4303,2400 v1(4303,2221) ; TP27.1@3967.12,1724 4003.14,1760.02 4003.14,1821.35 4017.27,1835.47 U6.1@4017.27,1896
  Bottom Layer w7.87: v1(1240,3883) 2117,3883 v1(2640,3360) ; v1(2831,3354) 2959,3226 3136,3226 3205,3295 3802,3295 v1(3911,3186) ; v1(4018,1841) 4304,2127 4304,2222 v1(4303,2221)
GND: C1.2 C2.1 C3.1 C4.1 C5.1 C6.1 C7.1 C8.1 C9.1 C10.1 C11.1 C12.1 C13.1 C14.1 C15.1 C16.1 C17.1 C18.1 D1.1 D2.1 D3.1 D5.2 Q1.2 Q2.2 Q3.2 Q4.2 Q5.2 Q6.2 Q7.2 Q8.2 Q9.2 Q10.2 Q11.2 Q12.2 Q13.2 Q14.2 Q15.2 Q16.2 Q17.2 Q18.2 Q19.2 Q20.2 Q21.2 Q22.2 Q23.2 Q24.2 Q25.2 Q26.2 Q27.2 Q28.2 Q29.2 Q30.2 Q31.2 Q32.2 Q33.2 R5.2 R6.2 R7.2 R8.2 R13.2 S4.3 S4.4 U1.1 U1.9 U1.16 U1.24 U2.15 U2.31 U2.36 U2.45 U2.65 U2.75 U3.9 U3.10 U3.11 U3.12 U3.13 U4.1 U5.12 U6.12 X1.3 X2.4 X3.2 | length 1706.2
  Top Layer w7.87: U2.15@2552.13,2907.32 U2.15@2552.43,2907.62 ; U2.31@2699.76,2680.94 2699.76,2593.29 C6.1@2710,2583.06 ; U2.36@2778.5,2680.94 2778.5,2632.21 2766,2619.71 2766,2558.54 C8.1@2797,2527.54 ; C8.1@2791.2,2514.74 C8.1@2804,2527.54 ; C5.1@2901.54,2560 2914.33,2572.8 2914.33,2601.8 2920.24,2607.7 U2.45@2920.24,2680.94 ; U2.65@3067.57,2970.62 U2.65@3067.87,2970.31 3174.85,2970.31 C9.1@3190,2985.46 ; U6.12@4017.27,2446 4018.27,2447 4117,2447 v1(4118,2448) ; U1.24@4851,2210.82 4851.67,2210.15 4851.67,2143.61 C13.1@4864.46,2130.82 C2.1@4864.46,2050.82
  Top Layer w11.81: 879.68,2812.6 U4.1@879.68,2836.38
  Top Layer w15.75: X3.2@315.59,2751.5 687.28,2751.49 711.14,2775.35 C15.1@720,2775.35 728.86,2775.35 763.5,2810 913.07,2810 913.07,2808.04 944.57,2776.54 C16.1@953.43,2776.54 ; C7.1@2382,2900 2387.18,2905.18 2387.18,2948.05 v2(2389.06,2949.94) ; v2(2745.06,2495.06) 2746.95,2496.95 2764.55,2496.95 2795.14,2527.54 2797,2527.54 C8.1@2804,2527.54 ; v2(2879.58,2614.31) 2879.58,2611.64 2892.68,2598.55 2892.68,2568.86 C5.1@2901.54,2560
  other v1: 1377.95,1771.65 3149.61,3740.16 3641.73,3937.01 2967.52,4245.3 3096.95,4245.3 3232.28,4245.3 3370.08,4245.3 3511.05,4245.3 3656.63,4245.3 3795.28,4245.3 3921.26,4245.3 4070.87,4245.3 4206.47,4245.3 4342,4254 4474,4254 4611.08,4254 4746.48,4254
  other v2: 196.85,1377.95 2559.06,1377.95 2952.76,1377.95 3346.46,1377.95 3543.31,1377.95 3937.01,1377.95 4330.71,1377.95 4724.41,1377.95 3654,1704 196.85,1771.65 393.7,1771.65 590.55,1771.65 2362.21,1771.65 2559.06,1771.65 2952.76,1771.65 4724.41,1771.65 2229,1772 3960,1839 3601,1853 295.28,1968.5 492.13,1968.5 885.83,1968.5 1082.68,1968.5 1279.53,1968.5 1476.38,1968.5 1673.23,1968.5 3051.18,1968.5 3248.03,1968.5 3838.58,1968.5 4822.84,1968.5 196.85,2165.35 590.55,2165.35 984.25,2165.35 1181.1,2165.35 1377.95,2165.35 2165.35,2165.35 2952.76,2165.35 3149.61,2165.35 3346.46,2165.35 3543.31,2165.35 3740.16,2165.35 3937.01,2165.35 4330.71,2165.35 4527.56,2165.35 688.98,2362.21 1279.53,2362.21 1476.38,2362.21 1673.23,2362.21 2066.93,2362.21 2460.63,2362.21 3444.88,2362.21 3838.58,2362.21 4822.84,2362.21 2731,2400 2984.58,2444.31 2860.58,2463.31 196.85,2559.06 393.7,2559.06 787.4,2559.06 1181.1,2559.06 1082.68,2755.91 1279.53,2755.91 1476.38,2755.91 1673.23,2755.91 1870.08,2755.91 3838.58,2755.91 4035.43,2755.91 4822.84,2755.91 2750.06,2838.94 2639.06,2940.94 196.85,2952.76 393.7,2952.76 590.55,2952.76 787.4,2952.76 984.25,2952.76 1574.8,2952.76 3740.16,2952.76 4133.86,2952.76 4724.41,2952.76 688.98,3149.61 1279.53,3149.61 3444.88,3149.61 3641.73,3149.61 4035.43,3149.61 4232.28,3149.61 4625.98,3149.61 4822.84,3149.61 2222.06,3151.94 196.85,3346.46 393.7,3346.46 4133.86,3346.46 4330.71,3346.46 4527.56,3346.46 4724.41,3346.46 2110.06,3518.94 1960.06,3527.94 492.13,3543.31 688.98,3543.31 885.83,3543.31 1476.38,3543.31 2657.48,3543.31 2854.33,3543.31 3838.58,3543.31 4035.43,3543.31 4429.13,3543.31 4625.98,3543.31 4822.84,3543.31 3539.58,3576.31 196.85,3740.16 393.7,3740.16 590.55,3740.16 787.4,3740.16 1377.95,3740.16 2165.35,3740.16 2559.06,3740.16 4527.56,3740.16 3015,3906 295.28,3937.01 492.13,3937.01 885.83,3937.01 1279.53,3937.01 2066.93,3937.01 2460.63,3937.01 2657.48,3937.01 4232.28,3937.01 4429.13,3937.01 4822.84,3937.01 1628,3952 1555,4025 196.85,4133.86 2559.06,4133.86
InBC1: Q50.1 U2.17 | length 1447.7
  Top Layer w7.87: v1(2505,2370) 2505,1951.49 2514.64,1941.85 2514.64,1805.76 2505,1796.12 2505,1582.34 Q50.1@2523,1564.34 ; v1(2511.4,2693.1) 2546.69,2693.1 2597.4,2743.81 2597.4,2866.11 2587.99,2875.53 2552.43,2875.53 U2.17@2552.13,2875.83 ; Q50.1@2517.72,1559.06 Q50.1@2523,1564.34 ; Q50.1@2533.46,1574.8 Q50.1@2523,1564.34
  Bottom Layer w7.87: v1(2505,2370) 2511.4,2376.4 v1(2511.4,2693.1)
InBC2: Q51.1 U2.38 | length 1689.3
  Top Layer w7.87: v1(2379,1622) 2379.92,1621.08 Q51.1@2379.92,1559.06 ; v1(2574,1625) 2803.72,1854.72 v1(2803.72,2423.28) ; v1(2774,2789) 2809.7,2753.3 2809.7,2681.25 U2.38@2810,2680.94 ; 2810.3,2644.7 U2.38@2810.3,2680.04
  Bottom Layer w7.87: v1(2379,1622) 2571,1622 v1(2574,1625) ; v1(2774,2789) 2801.44,2761.56 2801.44,2425.56 v1(2803.72,2423.28)
InBC3: Q52.1 U2.58 | length 2316.9
  Top Layer w7.87: v1(2241,1656) 2242.13,1654.87 Q52.1@2242.13,1559.06 ; U2.58@3067.87,2860.08 3068.18,2860.38 3328.47,2860.38 3410.45,2778.4 v1(3410.45,2696)
  Bottom Layer w7.87: v1(2241,1656) 2242,1657 2645,1657 3060.04,2072.04 3060.04,2232.11 3410.45,2582.51 v1(3410.45,2696)
InBC4: Q53.1 U2.59 | length 2536.2
  Top Layer w7.87: v1(2104,1682) 2104.33,1681.67 Q53.1@2104.33,1559.06 ; v1(2996.93,2083) 3000.93,2087 v1(3082.68,2087) ; U2.59@3067.87,2875.83 3351.16,2875.83 3451.74,2775.25 v1(3451.74,2697.32)
  Bottom Layer w7.87: v1(2104,1682) 2595.93,1682 v1(2996.93,2083) ; v1(3082.68,2087) 3082.68,2218.5 3451.74,2587.56 v1(3451.74,2697.32)
InBC5: Q54.1 U2.60 | length 2393.6
  Top Layer w7.87: v1(1966,1711) 1966.54,1710.46 Q54.1@1966.54,1559.06 ; v1(2894,2900) 2894,2830 v1(2897,2827) ; v1(2995,2862) 3024.57,2891.57 U2.60@3067.87,2891.57
  Bottom Layer w7.87: v1(1966,1711) 2559.46,1711 3035.61,2187.14 3035.61,2690.41 2899.01,2827 v1(2897,2827) ; v1(2894,2900) 2914,2900 2952,2862 v1(2995,2862)
InBC6: Q55.1 U2.61 | length 2151.7
  Top Layer w7.87: Q55.1@1828.74,1559.06 1828.74,1711.74 v1(1832,1715) ; v1(2731.26,2933.17) 2744.98,2946.89 v1(2805.11,2946.89) ; v1(2986,2895) 2990.79,2895 3003.12,2907.32 U2.61@3067.87,2907.32 U2.61@3068.18,2907.62
  Bottom Layer w7.87: v1(1832,1715) 1914,1797 1968,1797 2543,2372 2543,2744.91 v1(2731.26,2933.17) ; v1@2806.73,2948.51 v1(2805.11,2946.89) 2893.11,2946.89 2945.64,2894.36 2985.36,2894.36 v1(2986,2895)
InBC7: Q56.1 U2.91 | length 2526.2
  Top Layer w7.87: v1(1688,1715) 1688,1711 1690.95,1708.05 Q56.1@1690.95,1559.06 ; v1(2303,2886) 2303,2946 v1(2306,2949) ; U2.91@2762.76,3196.69 2763.06,3196.39 2763.06,3159.44 2786.54,3135.97 v1(2786.54,3107)
  Bottom Layer w7.87: v1(1688,1715) 1822,1849 1943,1849 2303,2209 v1(2303,2886) ; v1(2306,2949) 2306,3088 2423,3205 2627.99,3205 2725.99,3107 v1(2786.54,3107)
InBC8: Q57.1 U2.92 | length 2632.2
  Top Layer w7.87: Q57.1@1553.15,1559.06 1553.15,1709.61 v1(1554,1710.46) ; v1(2266,2885) 2266,2944 v1(2267,2945) ; v1(2281,3105) 2351,3105 2351.61,3104.39 2361.61,3104.39 v1(2365,3101) ; v1(2747,3082) U2.92@2747.01,3196.69
  Bottom Layer w7.87: v1(1554,1710.46) 1730.54,1887 1935,1887 2266,2218 v1(2266,2885) ; v1(2267,2945) 2267,3091 v1(2281,3105) ; v1(2365,3101) 2455.22,3191.22 2619.79,3191.22 2725.62,3085.39 2743.61,3085.39 v1(2747,3082)
InBC9: Q58.1 U2.32 | length 2069.1
  Top Layer w7.87: Q58.1@1415.35,1559.06 1415.35,1631.03 1521.96,1737.64 1927.68,1737.64 v1(1929.13,1736.18) ; v1(2708,2765) 2708,2741.02 2715.51,2733.51 U2.32@2715.51,2680.94
  Bottom Layer w7.87: v1(1929.13,1736.18) 1929.13,1738.01 2708,2516.88 v1(2708,2765)
InBC10: Q59.1 U2.33 | length 2258.6
  Top Layer w7.87: Q59.1@1277.56,1559.06 1277.56,1583.56 1463,1769 v1(2010,1769) ; U2.33@2731.26,2680.94 v1(2731.26,2788)
  Bottom Layer w7.87: v1(2010,1769) 2010,1799.39 2731.26,2520.65 v1(2731.26,2788)
InBC11: Q60.1 U2.34 | length 2234.4
  Top Layer w7.87: Q60.1@1139.76,1559.06 1139.76,1566.93 1367.13,1794.29 2114.11,1794.29 v1(2118.7,1789.7) ; v1(2696,2367) 2699.36,2370.36 2699.36,2501.36 2745.83,2547.83 2745.83,2679.76 U2.34@2747.01,2680.94
  Bottom Layer w7.87: v1(2118.7,1789.7) v1(2696,2367)
InBC12: Q61.1 U2.35 | length 2553.6
  Top Layer w7.87: Q61.1@1001.97,1559.06 1001.97,1566.93 1254.68,1819.64 2210.36,1819.64 v1(2211,1819) ; U2.35@2762.76,2680.94 2762.76,2728.19 2778.81,2744.24 v1(2778.81,2744.91)
  Bottom Layer w7.87: v1(2211,1819) 2211,1823 2778.81,2390.81 v1(2778.81,2744.91)
InBC13: Q62.1 U2.41 | length 2844.3
  Top Layer w7.87: Q62.1@864.17,1559.06 864.17,1566.93 1138.88,1841.64 2265.43,1841.64 v1(2268.07,1839) ; v1(2814.41,2791.77) 2814.41,2771.59 2857.24,2728.76 U2.41@2857.24,2680.94
  Bottom Layer w7.87: v1(2268.07,1839) 2300.58,1871.51 2300.58,1871.72 2313.84,1884.98 2314.05,1884.98 2826.36,2397.29 2826.36,2499.64 2815.22,2510.78 2815.22,2790.96 v1(2814.41,2791.77)
InBC14: Q63.1 U2.42 | length 3028.8
  Top Layer w7.87: Q63.1@726.38,1559.06 726.38,1566.93 1021.79,1862.34 v1(2323.22,1862.34) ; v1(2847.26,2782.26) 2847.26,2758.38 2872.99,2732.65 U2.42@2872.99,2680.94 U2.42@2873.29,2681.25
  Bottom Layer w7.87: v1(2323.22,1862.34) 2910.44,2449.56 2910.44,2645.56 2847.26,2708.74 v1(2847.26,2782.26)
InBC15: Q64.1 U2.43 | length 3144
  Top Layer w7.87: Q64.1@588.58,1559.06 588.58,1566.93 907.65,1886 v1(2385,1886) ; v1(2881,2765) 2881,2745.48 2888.36,2738.12 2888.36,2681.32 U2.43@2888.74,2680.94
  Bottom Layer w7.87: v1(2385,1886) 2385,1893.01 2924.22,2432.24 2924.22,2668.78 2881,2712 v1(2881,2765)
InBC16: Q65.1 U2.44 | length 3253.1
  Top Layer w7.87: Q65.1@450.79,1559.06 450.79,1566.93 796.86,1913 v1(2437,1913) ; U2.44@2904.79,2680.64 U2.44@2904.49,2680.94 2904.49,2736.49 v1(2911,2743)
  Bottom Layer w7.87: v1(2437,1913) 2440,1913 2443,1916 2938,2411 2938,2694 2911,2721 v1(2911,2743)
InC1: Q34.1 U2.72 | length 1516.5
  Top Layer w7.87: Q34.1@2718.5,4122.84 2718.5,3550.5 2778.5,3490.5 v1(2778.5,3417) ; U2.72@3067.87,3080.55 3069.06,3081.73 3144.77,3081.73 3154.53,3091.49 v1(3172,3091.49)
  Bottom Layer w7.87: v1(2778.5,3417) 2778.5,3197.65 2909.16,3067 3147.51,3067 v1(3172,3091.49)
InC2: Q35.1 U2.76 | length 995.4
  Top Layer w7.87: Q35.1@2856.3,4122.84 2844,4110.54 2844,3769.89 2998.82,3615.07 2998.82,3196.85 U2.76@2998.98,3196.69
InC3: Q36.1 U2.77 | length 940.8
  Top Layer w7.87: v1(2971,3543) 2983.23,3530.77 U2.77@2983.23,3196.69 ; v1(2981,3979) 2981,4109.74 Q36.1@2994.09,4122.84
  Bottom Layer w7.87: v1(2971,3543) 2971,3964.21 2981,3974.21 v1(2981,3979)
InC4: Q37.1 U2.78 | length 1026.4
  Top Layer w7.87: v1(2934,3743) 2935.15,3741.85 3131.89,3938.58 Q37.1@3131.89,4122.84 ; v1(2936,3587) 2936,3585.62 2937.62,3584 2937.62,3532.22 2967.64,3502.2 2967.64,3196.85 U2.78@2967.48,3196.69
  Bottom Layer w7.87: v1(2934,3743) 2934,3744 2936,3742 v1(2936,3587)
InC5: Q38.1 U2.81 | length 1129.4
  Top Layer w7.87: U2.81@2920.24,3196.69 2920.24,3315.24 2930,3325 v1(2930,3392) ; v1(3029,3393) 3029,3725 3271,3967 3271,4121.52 Q38.1@3269.68,4122.84
  Bottom Layer w7.87: v1(2930,3392) 3028,3392 v1(3029,3393)
InC6: Q39.1 U2.82 | length 1458.5
  Top Layer w7.87: v1(2873,3673) 2873,3671 2872.99,3569.72 2947,3495.71 2947,3445 2904.49,3402.49 U2.82@2904.49,3196.69 ; v1(3399.68,4046.52) 3399.68,4115.04 Q39.1@3407.48,4122.84
  Bottom Layer w7.87: v1(2873,3673) 2873,3957 2934,4018 3375,4018 3402,4045 3403,4045 3401.48,4046.52 v1(3399.68,4046.52)
InC7: Q40.1 U2.83 | length 1259.2
  Top Layer w7.87: U2.83@2888.74,3196.69 2889,3196.95 2888.74,3197.21 v1(2888.74,3430.38) ; Q40.1@3545.27,4122.84 3545.27,4042.73 v1(3546,4042)
  Bottom Layer w7.87: v1(2888.74,3430.38) 2888.74,3487.74 2921.36,3520.36 3024.36,3520.36 v1(3546,4042)
InC8: Q41.1 U2.84 | length 1390.5
  Top Layer w7.87: U2.84@2872.99,3196.69 2872.99,3254.66 2866.1,3261.55 2866.1,3439.75 2893.35,3467 v1(2920,3467) ; v1(3683.07,4046.52) Q41.1@3683.07,4122.84
  Bottom Layer w7.87: v1(2920,3467) 3103.55,3467 v1(3683.07,4046.52)
InC9: Q42.1 U2.68 | length 1491.4
  Top Layer w7.87: U2.68@3067.87,3017.56 3066.69,3018.74 3021.26,3018.74 3010.44,3029.56 3010.44,3130.44 3820.87,3940.87 Q42.1@3820.87,4122.84
InC10: Q43.1 U2.69 | length 1666.2
  Top Layer w7.87: U2.69@3067.87,3033.31 3283.25,3033.31 3352,3102.05 v1(3352,3112.05) ; v1(3255,3214) 3257,3214 3958.66,3915.66 Q43.1@3958.66,4122.84
  Bottom Layer w7.87: v1(3255,3214) 3352,3117 v1(3352,3112.05)
InC11: Q44.1 U2.70 | length 1622.9
  Top Layer w7.87: U2.70@3067.87,3049.05 3067.98,3048.94 3212.45,3048.94 v1(3255,3091.49) ; v1(3212,3130) 4096.46,4014.46 Q44.1@4096.46,4122.84
  Bottom Layer w7.87: v1(3212,3130) 3214.25,3130 3252.75,3091.49 v1(3255,3091.49)
InC12: Q45.1 U2.71 | length 1624.3
  Top Layer w7.87: U2.71@3067.87,3064.8 3187.8,3064.8 3944,3821 3966,3821 4234.25,4089.25 Q45.1@4234.25,4122.84
InC13: Q46.1 U2.79 | length 1961.4
  Top Layer w7.87: U2.79@2951.73,3196.69 2952.03,3196.39 2952.03,3160.83 2967.71,3145.16 2998.75,3145.16 3061,3207.41 3061,3360 3452.36,3751.36 3566.64,3751.36 v1(3567,3751) ; v1@4009.54,3752.46 4372.05,4114.96 Q46.1@4372.05,4122.84
  Bottom Layer w7.87: v1(3567,3751) 4007,3751 v1(4009,3753)
InC14: Q47.1 U2.80 | length 2014.5
  Top Layer w7.87: U2.80@2935.98,3196.69 2935.98,3266.64 2945,3275.66 v1(2945,3294.13) ; v1(3096.95,3294.13) v1(3515.12,3712.3) ; v1@4107.44,3712.56 4509.84,4114.96 Q47.1@4509.84,4122.84
  Bottom Layer w7.87: v1(2945,3294.13) v1(3096.95,3294.13) ; v1(3515.12,3712.3) 3515.42,3712 v1(4108,3712)
InC15: Q48.1 U2.47 | length 2479.3
  Top Layer w7.87: U2.47@2951.73,2680.94 2951.73,2632.97 3006.1,2578.61 3006.1,2555.9 v1(3008,2554) 3008.23,2554.23 3098.93,2554.23 3311,2766.3 v1(3311,2785) ; v1(3536,2966) 4643.91,4073.91 4643.91,4111.24 4647.64,4111.24 Q48.1@4647.64,4099.64
  Bottom Layer w7.87: v1(3311,2785) 3473.02,2947.02 3517.02,2947.02 v1(3536,2966)
InC16: Q49.1 U2.48 | length 2603.8
  Top Layer w7.87: U2.48@2967.78,2680.64 U2.48@2967.48,2680.94 2967.48,2641.64 3023.54,2585.58 v1(3098.27,2585.58) ; v1(3105.61,2524.88) 3106.66,2524.88 3158.77,2577 3159,2577 v1(3332,2750) ; v1(3522.38,2907.94) 3578.41,2907.94 4785.43,4114.96 Q49.1@4785.43,4122.84
  Bottom Layer w7.87: v1(3098.27,2585.58) 3098.27,2532.23 v1(3105.61,2524.88) ; v1(3332,2750) 3364.44,2750 v1(3522.38,2907.94)
L1: TP23.1 U2.24 U5.10 | length 2070.9
  Top Layer w7.87: TP23.1@795.98,3393.94 800.89,3389.03 TP23.1@803.15,3391.28 803.15,3425.1 832.37,3395.88 837.81,3401.32 v1(901.58,3401.32) ; v1(1043,3382) 1076.18,3348.82 U5.10@1237.09,3348.82 1258.55,3348.82 1657.84,2949.53 1887.47,2949.53 1980.5,2856.5 ; 1980,2856 2070.41,2765.59 U2.24@2552.13,2765.59
  Bottom Layer w7.87: v1(901.58,3401.32) 957.42,3401.32 976.74,3382 v1(1043,3382)
L2: TP24.1 U2.25 U5.11 | length 1980
  Top Layer w7.87: TP24.1@905.67,3194.2 912.26,3187.6 v1(1032.04,3187.6) ; v1(1153.41,3192) 1152.59,3192.82 1152.59,3287.86 1163.55,3298.82 U5.11@1237.09,3298.82 1272.18,3298.82 1651,2920 1866.32,2920 2036.48,2749.84 U2.25@2552.13,2749.84
  Bottom Layer w7.87: v1(1032.04,3187.6) 1036.44,3192 v1(1153.41,3192)
L3: TP25.1 U2.22 U5.14 | length 1994.3
  Top Layer w7.87: U5.14@1593.62,3298.82 1626.18,3298.82 2127.91,2797.09 2448.62,2797.09 ; v1(2448.62,2664) 2604.26,2508.35 2604.26,2329.62 2603,2328.36 2603,2157.63 2647.23,2113.4 TP25.1@2660.29,2113.4 ; v1(2449.34,2820.76) 2448.62,2820.03 2448.62,2797.09 ; U2.22@2552.13,2797.09 2448.62,2797.09
  Bottom Layer w7.87: v1(2448.62,2664) 2448.62,2820.03 v1(2449.34,2820.76)
L4: TP26.1 U2.23 U5.13 | length 1246.3
  Top Layer w7.87: U5.13@1593.62,3248.82 1629.44,3248.82 1679.13,3199.12 2022.26,2856 2023,2856 2097.66,2781.34 U2.23@2552.13,2781.34 ; TP26.1@1606.45,3139.19 1672.76,3205.5 ; TP26.1@1612.48,3132.82 TP26.1@1612.83,3132.82
LB1: TP31.1 U2.63 U6.10 | length 1777.1
  Top Layer w7.87: v1(2956,2917) 2956.64,2917.64 2988.5,2917.64 3009.68,2938.82 U2.63@3067.87,2938.82 ; v1(3389,2905) 3421.54,2905 3567.48,2759.06 ; v1(3534.53,2727.38) 3566.22,2759.06 3567.48,2759.06 ; TP31.1@3724,2848.42 3732.05,2840.36 v1(3732.05,2763.48) ; U6.10@4017.27,2346 3980.54,2346 3567.48,2759.06
  Bottom Layer w7.87: v1(2956,2917) 2956.64,2917.64 2986.64,2917.64 3000,2931 3340,2931 3366,2905 v1(3389,2905) ; v1(3534.53,2727.38) 3695.95,2727.38 v1(3732.05,2763.48)
LB2: TP30.1 U2.64 U6.11 | length 1511.7
  Top Layer w7.87: v1(2964,2949) 2988.57,2954.57 U2.64@3067.87,2954.57 ; v1(3372,2949) 3375,2941.77 3381.77,2935 3444.19,2935 3828.39,2550.81 ; TP30.1@3891.93,2645.08 3891.93,2610.24 3832.5,2550.81 3828.39,2550.81 ; U6.11@4017.27,2396 3983.19,2396 3828.39,2550.81
  Bottom Layer w7.87: v1(2964,2949) v1(3372,2949)
LB3: TP29.1 U2.73 U6.14 | length 1757.5
  Top Layer w7.87: v1(2940,3114) 2919.58,3093.58 2919.58,2836.43 2919.64,2836.38 2919.64,2827.28 3033.32,2713.6 3097.58,2713.6 v1(3157.18,2654) ; U2.73@3067.87,3096.3 3068.18,3096.6 3139.95,3096.6 3164.85,3121.5 v1(3164.85,3145.16) ; TP29.1@3209.35,2405.51 3330.28,2405.51 3365.88,2441.11 ; v1(3245,2561.99) 3365.88,2441.11 ; U6.14@3660.73,2396 3410.99,2396 3365.88,2441.11
  Bottom Layer w7.87: v1(2940,3114) 2971.16,3145.16 v1(3164.85,3145.16) ; v1(3157.18,2654) 3160,2651.18 3160,2646.99 v1(3245,2561.99)